# Altium PCB TermWylPompy1.PcbDoc
Units mm, origin at the board's own origin, x right, y up, seen from the top; angles counter-clockwise.
Board outline 230 x 115 mm, 2 copper layers (Top Layer, Bottom Layer), stack 1.621 mm thick; 150 components, 132 nets, 573 pads, 0 vias.
Unrouted connection lines stored in the file: 337.
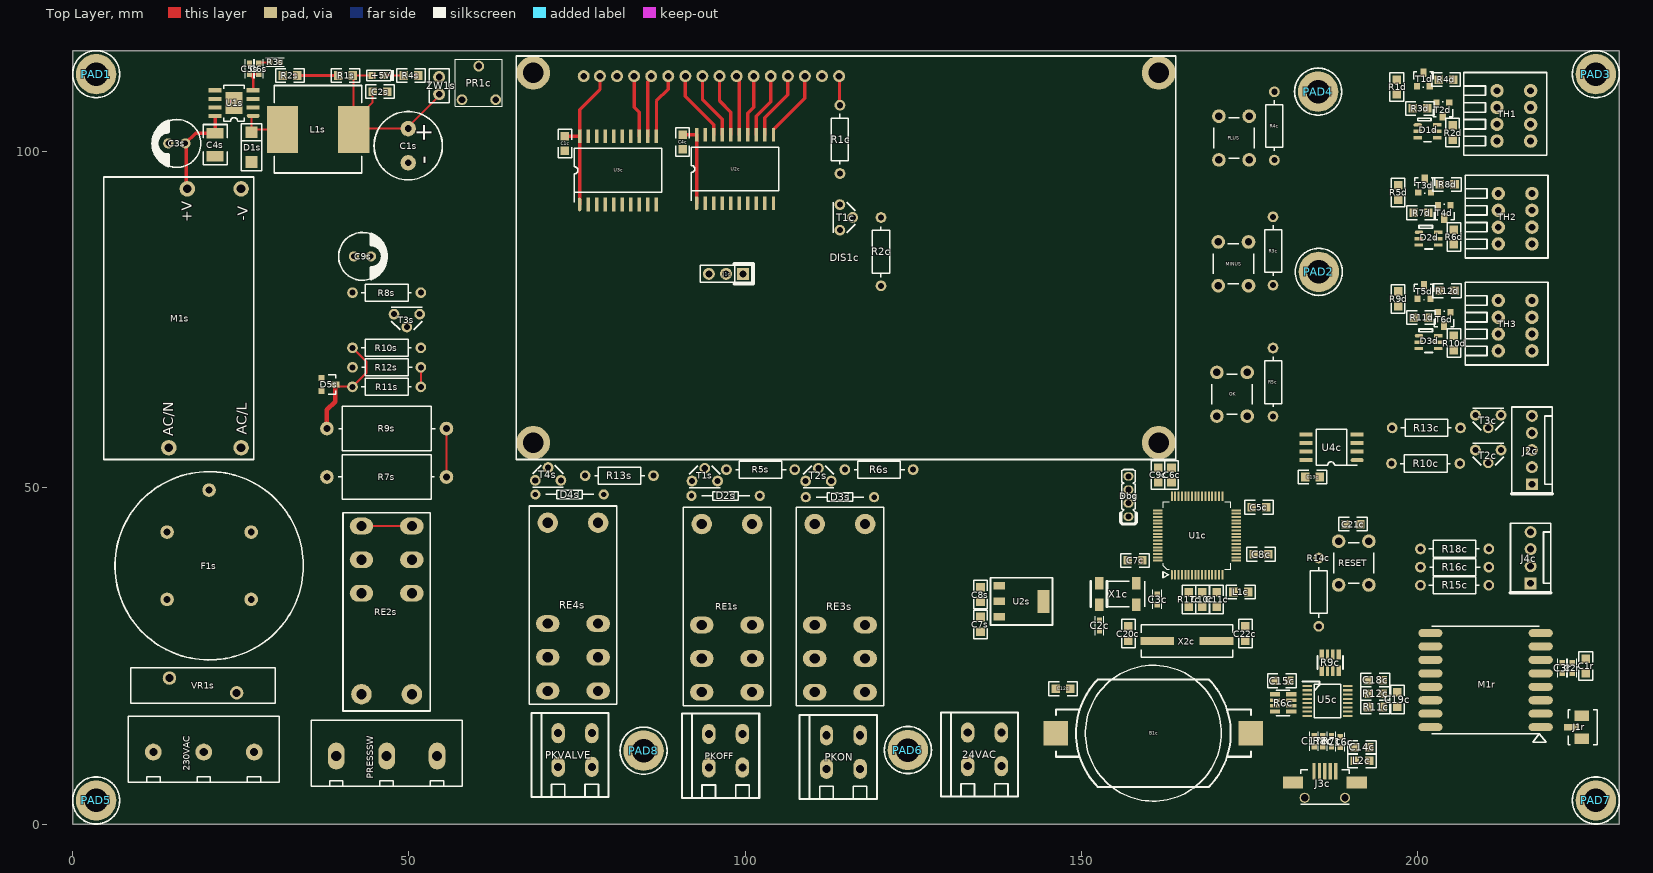
[diagram p0: Top Layer view]
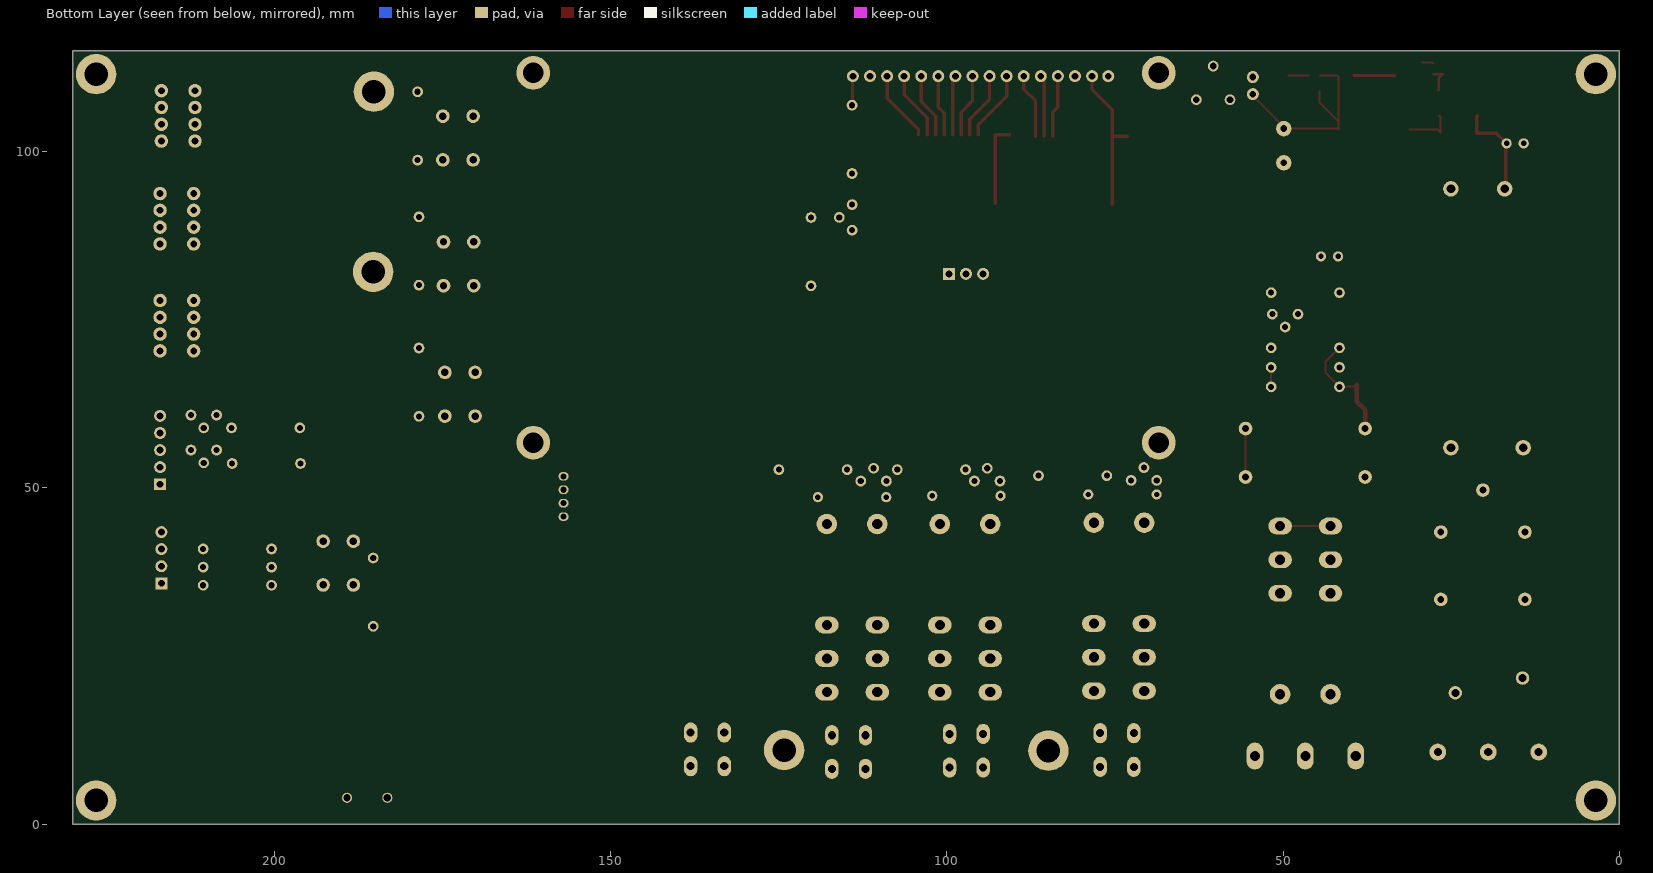
[diagram p1: Bottom Layer view, seen from below]

## Layer stack, top to bottom
Top Solder: solder mask 0.0102, Solder Resist, Dk 3.5
Top Layer: signal copper 0.0356
Dielectric1: dielectric 1.55, FR-4, Dk 4.8
Bottom Layer: signal copper 0.0356
Bottom Solder: solder mask 0.0102, Solder Resist, Dk 3.5

## Board outline
0,0 0,115 230,115 230,0

## Design rules (kind name [scope] priority, off if disabled: settings)
BoardOutlineClearance [All] p1: gap=0.5 ignorepadtopadclearanceinfootprint=FALSE
Clearance ClearanceMains [InNet('PUMPL')  or InNet('PUMPN') or InNet('PRESSSWL') or InNet('PRESSSWN') or InNet('ACL') or InNet('ACN') or InNet('ACFL') or InNet('ACFN')] p1: gap=3.5 ignorepadtopadclearanceinfootprint=TRUE
Clearance InPolyClearance [InPoly] p2: gap=0.3 ignorepadtopadclearanceinfootprint=FALSE except(0: Arc-Hole Track-Hole SMDPad-Hole THPad-Hole Via-Hole Fill-Hole Poly-Hole Region-Hole Text-Hole)
Clearance ClearanceMidLayer [OnMid] p3: gap=0.152 ignorepadtopadclearanceinfootprint=FALSE except(0: Arc-Hole Track-Hole SMDPad-Hole THPad-Hole Via-Hole Fill-Hole Poly-Hole Region-Hole Text-Hole)
Clearance ClearanceOuterLayer [OnBottomLayer or OnTopLayer] p4: gap=0.152 ignorepadtopadclearanceinfootprint=FALSE
ComponentClearance [All] p1 off: gap=0.254 collisioncheckmode=3 verticalgap=0.254 showdistances=FALSE
Height [All] p1: minheight=0 maxheight=40 prefheight=12.7
HoleSize [All] p1: absolutevalues=TRUE maxlimit=6 minlimit=0.025 maxpercent=80.000 minpercent=20.000
MinimumAnnularRing MinimumAnnularRingOuterLayer [OnTopLayer or OnBottomLayer] p1: minimumring=0.152
MinimumAnnularRing MinimumAnnularRingOnMid [OnMid] p2: minimumring=0.127
MinimumSolderMaskSliver [not(IsComponentPrimitive and OnSolderMask)] p1 off: minsoldermaskwidth=0.1
MinimumSolderMaskSliver SilkscreenOverComponentPads [All] p2: minsoldermaskwidth=0.1
NetAntennae [All] p1: netantennaetolerance=0.3
PolygonConnect PolygonConnectDirect [IsVia] p1: connectstyle=Direct reliefconductorwidth=0.254 reliefentries=4 polygonreliefangle="90 Angle" airgapwidth=0.254
PolygonConnect PolygonConnectElse [All] p2: connectstyle=Relief reliefconductorwidth=0.25 reliefentries=4 polygonreliefangle="90 Angle" airgapwidth=0.25
RoutingVias [All] p1: holewidth=0.6 width=1.1 viastyle="Through Hole" minholewidth=0.3 minwidth=0.5 maxholewidth=2 maxwidth=4
SilkToSilkClearance [All] p1: silktosilkclearance=0.1
SilkToSolderMaskClearance SilkToSolderMaskClearanceVia [IsVia] p1: minsilkscreentomaskgap=0.1 clearancetoexposedcopper=TRUE
SilkToSolderMaskClearance SilkToSolderMaskClearancePad [IsPad] p2: minsilkscreentomaskgap=0.1 clearancetoexposedcopper=TRUE
SolderMaskExpansion [All] p1: expansion=0.1 istentingtop=FALSE
UnRoutedNet [All] p1: checkbadconnections=TRUE
Width [All] p1: maxlimit=4 minlimit=0.102 preferedwidth=0.18 minimp=50.000000 maximp=50.000000 favimp=50.000000 checkconnectedcopper=TRUE
22 further rules are at their usual default settings.

## Classes and differential pairs
component class TermWylPompy1_main: PAD1 PAD2 PAD3 PAD4 PAD5 PAD6 PAD7 PAD8
component class Zasilanie: 24VAC 230VAC +5V C1s C2s C3s C4s C5s C6s C7s C8s C9s D1s D2s D3s D4s D5s F1s L1s M1s PKOFF PKON PKVALVE PRESSSW PRESSSW1s PUMP1s R1s R2s R3s R4s R5s R6s R7s R8s R9s R10s R11s R12s R13s RE1s RE2s RE3s RE4s T1s T2s T3s T4s U1s U2s VR1s ZW1s
component class Radio: C1r C2r C3r J1r M1r
component class DS18B20: D1d D2d D3d R1d R2d R3d R4d R5d R6d R7d R8d R9d R10d R11d R12d T1d T2d T3d T4d T5d T6d TH1 TH2 TH3
component class CPU: B1c C1c C2c C3c C4c C5c C6c C7c C8c C9c C10c C11c C12c C13c C14c C15c C16c C17c C18c C19c C20c C21c C22c Dbg DIS1c J1c J2c J3c J4c L1c L2c MINUS OK PLUS PR1c R1c R2c R3c R4c R5c R6c R7c R8c R9c R10c R11c R12c R13c R14c R15c R16c R17c R18c RESET T1c T2c T3c TXDA TXDB U1c U2c U3c U4c U5c X1c X2c

## Components (designator, comment, footprint, x,y, rotation, side; value= is the part's Value field where it differs from the comment)
24VAC "DG235-5.0-02P" DG235-5.0-02P 135.6,11.1 r0 top
230VAC "DG300-7.5-3P11" DG300-7.5-3P11#1 19.5,10.7 r180 top
+5V "LED0603-RW120" D0603 45.4,111.3 r0 top
B1c "CH004-2032" CH004-2032 160.7,13.5 r0 top
C1c "100n/50" 0805 73.2,101.2 r270 top
C1r "10u/10" 0805 225,23.5 r90 top
C1s "470u/25" CE2040 49.9,103.4 r270 top
C2c "15p/50" 0603-IPC 152.7,29.5 r90 top
C2r "100n/50" 0603-IPC 223,23.2 r90 top
C2s "100n/50" 0805 45.7,108.9 r0 top
C3c "15p/50" 0603-IPC 161.3,33.4 r270 top
C3r "100p/50" 0603-IPC 221.5,23.2 r90 top
C3s "100u/35" CE1028#1 15.5,101.2 r180 top
C4c "100n/50" 0805 90.7,101.4 r270 top
C4s "4u7/50" 1210 21.2,102.729 r270 top
C5c "100n/50" 0805 176.4,47.1 r0 top
C5s "220p/50" 0603-IPC 26.3,112.3 r90 top
C6c "100n/50" 0805 163.4,51.9 r90 top
C6s "22n/50" 0603-IPC 27.7,112.3 r90 top
C7c "100n/50" 0805 158,39.2 r180 top
C7s "1u/25" 0805 135,29.7 r270 top
C8c "100n/50" 0805 176.7,40.1 r0 top
C8s "1u/25" 0805 135,34.1 r90 top
C9c "4u7/16" 0805 161.4,51.9 r90 top
C9s "100u/35" CE1028#2 43.1,84.4 r0 top
C10c "10n/50" 0805 168,33.4 r270 top
C11c "1u/25" 0805 170.1,33.4 r270 top
C12c "100n/50" 0805 147.3,20.1 r0 top
C13c "100n/50" 0805 184.4,51.6 r0 top
C14c "10n/50" 0805 191.7,11.4 r180 top
C15c "100n/50" 0805 179.8,21.3 r180 top
C16c "47p/50" 0603-IPC 188.5,12.2 r90 top
C17c "47p/50" 0603-IPC 184.6,12.3 r90 top
C18c "10n/50" 0805 193.7,21.4 r180 top
C19c "4u7/16" 0805 197,18.5 r90 top
C20c "22p/50" 0805 157,28.3 r270 top
C21c "100n/50" 0805 190.4,44.6 r0 top
C22c "22p/50" 0805 174.4,28.3 r270 top
D1d "RCLAMP0504S.TCT" SOT23-6 200,103.95 r270 top
D1s "10MQ040N" SMA 26.6,100.7 r0 top
D2d "RCLAMP0504S.TCT" SOT23-6 200.2,88 r270 top
D2s "1N4148" CE02 97.1,48.8 r180 top
D3d "RCLAMP0504S.TCT" SOT23-6 200.2,72.6 r270 top
D3s "1N4148" CE02 114.1,48.6 r180 top
D4s "1N4148" CE02 73.9,49 r180 top
D5s "BZX84C5V1" SOT23-3 37,66.3 r270 top
Dbg "ZL303-04P" PLMS4S 157,45.7 r90 top
DIS1c "JHD204A-BW" JHD204A 115,84.2 r0 top
F1s "1FM414-1R" 1FM414 20.3,38.4 r90 top
J1c "JUMPERx3" 3SIP100 99.7,81.8 r180 top
J1r "RF-IPX125-1G" HIROSE-UFL 224.4,14.4 r270 top
J2c "NS25-W5P" WF05S 217,55.6 r90 top
J3c "MUSB-B5-S-VT-TSMT-1" MUSB-B5-S-VT-TSMT1 186.2,8.1 r0 top
J4c "NS25-W4P" WF04S 216.8,39.6 r90 top
L1c "BLM21AG121SN1D" 0805 173.7,34.5 r180 top
L1s "68u/3.2A" SRR1208 36.5,103.3 r0 top
L2c "BLM21AH102" 0805 191.7,9.4 r0 top
M1r "RFM98W" RFM98W 210.1,21.4 r0 top
M1s "MFM-10-24" MFM-10-24 15.8,74.2 r90 top
MINUS "DTS63K" DTS63K 172.6,83.3 r180 top
OK "DTS63K" DTS63K 172.4,63.9 r180 top
PAD1 "PAD3_5MM" PAD3_5MM 3.5,111.5 r0 top
PAD2 "PAD3_5MM" PAD3_5MM 185.3,82.1 r0 top
PAD3 "PAD3_5MM" PAD3_5MM 226.5,111.5 r0 top
PAD4 "PAD3_5MM" PAD3_5MM 185.2,108.9 r0 top
PAD5 "PAD3_5MM" PAD3_5MM 3.5,3.5 r0 top
PAD6 "PAD3_5MM" PAD3_5MM 124.2,11 r0 top
PAD7 "PAD3_5MM" PAD3_5MM 226.5,3.5 r0 top
PAD8 "PAD3_5MM" PAD3_5MM 84.9,10.9 r0 top
PKOFF "DG235-5.0-02P" DG235-5.0-02P 97.1,10.9 r0 top
PKON "DG235-5.0-02P" DG235-5.0-02P 114.6,10.7 r0 top
PKVALVE "DG235-5.0-02P" DG235-5.0-02P 74.7,11 r0 top
PLUS "DTS63K" DTS63K 172.7,102 r180 top
PR1c "RKT6V-20K" RKT6V 60.4,110.2 r0 top
PRESSSW "DG300-7.5-3P11" DG300-7.5-3P11#2 46.7,10.1 r180 top
R1c "27R 5%" R402510 114.1,101.8 r270 top
R1d "4k7" 0805R 196.9,109.6 r90 top
R1s "8k2" 0805R 40.6,111.3 r180 top
R2c "13k 5%" R402510 120.2,85.1 r90 top
R2d "4k7" 0805R 205.2,102.8 r90 top
R2s "2k7" 0805R 32.3,111.3 r180 top
R3c "13k 5%" R402510 178.5,85.2 r270 top
R3d "100R" 0805R 200.321,106.4 r0 top
R3s "4k7" 0603R 30.1,113.3 r0 top
R4c "13k 5%" R402510 178.7,103.8 r270 top
R4d "100R" 0805R 204.2,110.7 r0 top
R4s "1k" 0805R 50.3,111.3 r0 top
R5c "13k 5%" R402510 178.5,65.7 r270 top
R5d "4k7" 0805R 197.1,93.9 r90 top
R5s "13k 5%" R402510 102.3,52.7 r180 top
R6c "4x47k" 1206RP 180,18 r90 top
R6d "4k7" 0805R 205.4,87.3 r90 top
R6s "13k 5%" R402510 119.9,52.7 r180 top
R7c "27R" 0603R 187.2,12.3 r90 top
R7d "100R" 0805R 200.5,90.9 r0 top
R7s "470R 5% 1W" R705226 46.7,51.6 r180 top
R8c "27R" 0603R 185.9,12.3 r90 top
R8d "100R" 0805R 204.4,95.1 r0 top
R8s "10k" R402510 46.7,79 r0 top
R9c "4x47k" 1206RP 187,24 r0 top
R9d "4k7" 0805R 197.1,78.1 r90 top
R9s "470R 5% 1W" R705226 46.7,58.8 r0 top
R10c "13k 5%" R402510 201.2,53.6 r0 top
R10d "4k7" 0805R 205.4,71.5 r90 top
R10s "13k 5%" R402510 46.7,70.8 r0 top
R11c "10k" 0805R 193.7,17.4 r180 top
R11d "100R" 0805R 200.5,75.3 r0 top
R11s "120R 5%" R402510 46.7,65 r0 top
R12c "15k" 0805R 193.7,19.4 r0 top
R12d "100R" 0805R 204.4,79.3 r0 top
R12s "120R 5%" R402510 46.7,67.9 r180 top
R13c "13k 5%" R402510 201.3,58.9 r0 top
R13s "13k 5%" R402510 81.3,51.8 r180 top
R14c "100k" R402510 185.3,34.479 r90 top
R15c "13k 5%" R402510 205.5,35.5 r0 top
R16c "13k 5%" R402510 205.5,38.2 r180 top
R17c "220R" 0805R 166,33.4 r270 top
R18c "13k 5%" R402510 205.5,40.9 r0 top
RE1s "RM94-2012-35-1024" RM84-P#1 97.3,44.6 r0 top
RE2s "RM84-2012-35-5230" RM84-P#2 46.7,19.3 r180 top
RE3s "RM94-2012-35-1024" RM84-P#1 114.1,44.6 r0 top
RE4s "RM94-2012-35-1024" RM84-P#1 74.4,44.8 r0 top
RESET "DTS63K" DTS63K 190.5,38.8 r0 top
T1c "BC547" CE35V4 116,90.2 r90 top
T1d "2N7002" SOT23-3 199.9,109.7 r0 top
T1s "BC547" CE35V4 94,52.9 r180 top
T2c "BC547" CE35V4 210.5,53.7 r0 top
T2d "2N7002" SOT23-3 204.7,107.3 r180 top
T2s "BC547" CE35V4 110.9,52.9 r180 top
T3c "BC547" CE35V4 210.5,58.9 r0 top
T3d "2N7002" SOT23-3 200.1,93.9 r0 top
T3s "BC547" CE35V4 49.7,73.9 r0 top
T4d "2N7002" SOT23-3 204.913,92.016 r180 top
T4s "BC547" CE35V4 70.7,53 r180 top
T5d "2N7002" SOT23-3 200,78.1 r0 top
T6d "2N7002" SOT23-3 204.9,76.1 r180 top
TH1 "Wago233-204" Wago233-204 214.3,105.3 r90 top
TH2 "Wago233-204" Wago233-204 214.5,90 r90 top
TH3 "Wago233-204" Wago233-204 214.5,74.1 r90 top
U1c "STM32F103RBT6" MS-026BCD 167.2,42.9 r90 top
U1s "L5973D" HSOP8 24,107.2 r180 top
U2c "SN74HC245DW" 20SOIC300 98.5,97.4 r90 top
U2s "NCP1117ST33T3G" SOT-223 137.8,35.4 r270 top
U3c "SN74HC245DW" 20SOIC300 81.1,97.2 r90 top
U4c "SST25VF016B-50-4I-S2AF" 8SOIC200 191,54.1 r180 top
U5c "FT230XS" MO-137AB 186.6,18.3 r0 top
VR1s "SIOV-S20K250" SIOV-S20K275 19.4,20.6 r180 top
X1c "ABS25-32.768KHZ-6-T" ABS25CRYSTAL 155.4,34.2 r0 top
X2c "8.00MHz" HC49SMP 165.7,27.2 r180 top
ZW1s "SHORT2MM54" SHUNT_2MM54 54.5,109.8 r90 top

## Footprints (in the part's own frame and the unit in brackets; to place one, negate y for a bottom-side part, rotate by r counter-clockwise, add the part's x,y. Pads: shape width x height; smd on the part's side, far side on the other; paste and mask are expansions set on the pad)
1FM414 [mil]
  round 80 hole 40: 1(-196.85,-246.06) 2(-196.85,246.06) 3(196.85,-246.06) 4(196.85,246.06) 5(442.91,0)
  silkscreen extent -551,-551 551,551
3SIP100 [mil]
  rect 70x70 hole 40: 1(0,0)
  round 70 hole 40: 2(100,0) 3(200,0)
  silkscreen extent -59,-59 250,59
8SOIC200 [mil]
  oval 76x24 smd: 1(0,0)
  rect 76x24 smd: 2(0,-50) 3(0,-100) 4(0,-150) 5(300,-150) 6(300,-100) 7(300,-50) 8(300,0)
  silkscreen extent 0,-180 240,30, body extent -10,-173 310,23, height 67
20SOIC300 [mil]
  oval 80x20 smd: 1(-200,225)
  rect 80x20 smd: 2(-200,175) 3(-200,125) 4(-200,75) 5(-200,25) 6(-200,-25) 7(-200,-75) 8(-200,-125) 9(-200,-175) 10(-200,-225) 11(200,-225) 12(200,-175) 13(200,-125) 14(200,-75) 15(200,-25) 16(200,25) 17(200,75) 18(200,125) 19(200,175) 20(200,225)
  silkscreen extent -187,-255 128,255, body extent -198,-251 196,248, height 67
0603-IPC [mm]
  rect 0.8x0.8 smd: 1(-0.8,0) 2(0.8,0)
  silkscreen extent -1.4,-0.65 1.4,0.65, body extent -0.8,-0.4 0.8,0.4, height 1
0603R [mm]
  rect 0.8x0.8 smd: 1(-0.8,0) 2(0.8,0)
  silkscreen extent -1.4,-0.65 1.4,0.65, body extent -0.8,-0.4 0.8,0.4, height 0.45
0805 [mil]
  rect 50x50 smd: 1(-42.5,0) 2(42.5,0)
  silkscreen extent -84,-40 84,40, body extent -39,-28 39,28, height 51
0805R [mil]
  rect 50x50 smd: 1(-42.5,0) 2(42.5,0)
  silkscreen extent -84,-40 84,40, body extent -39,-25 39,25, height 24
1206RP [mm]
  rect 0.65x1.524 smd: 1(-1.275,-1.219) 4(1.275,-1.219) 5(1.275,1.219) 8(-1.275,1.219)
  rect 0.5x1.524 smd: 2(-0.4,-1.219) 3(0.4,-1.219) 6(0.4,1.219) 7(-0.4,1.219)
  silkscreen extent -1.9,-1 1.9,1, body extent -1.6,-0.8 1.6,0.8, height 0.55
1210 [mil]
  rect 60x100 smd: 1(0,0) 2(135,0)
  silkscreen extent -50,-70 185,70, body extent 5,-49 130,49, height 75
ABS25CRYSTAL [mm]
  rect 1.3x1.9 smd paste+0 mask+0.04: 1(-2.75,-1.6) 2(2.75,-1.6) 3(2.75,1.6) 4(-2.75,1.6)
  silkscreen extent -4,-1.9 4,1.9, body extent -4,-2 4,2, height 2.5
CE02 [mil]
  round 60 hole 31.5: ANOD(200,0) CATH(-200,0)
  silkscreen extent -140,-25 140,25, body extent -212,-51 212,51, height 98
CE35V4 [mm]
  round 1.6 hole 0.9: BASE(0,0) COLL(1.905,1.905) EMIT(-1.905,1.905)
  silkscreen extent -2.29,-0.38 2.29,2.92, body extent -2.66,-1.09 2.66,3.23, height 11.33
CE1028#1 [mil]
  round 60 hole 32: 1(50,0) 2(-50,0)
  silkscreen extent -140,-140 140,140, body extent -138,-138 137,138, height 591
CE1028#2 [mil]
  round 60 hole 31.5: 1(50,0) 2(-50,0)
  silkscreen extent -140,-140 140,140, body extent -138,-138 137,138, height 591
CE2040 [mil]
  round 90 hole 40: 1(200,0) 2(0,0)
  silkscreen extent -100,-200 300,200, body extent -96,-197 296,196, height 787
CH004-2032 [mm]
  rect 3.6x3.6 smd: 1(-14.5,0) 2(14.5,0)
  silkscreen extent -14.5,-10.1 14.5,10.1, body extent -15,-10 15,9.96, height 6
D0603 [mm]
  rect 1.1x1 smd: ANOD(-0.85,0) CATH(0.85,0)
  silkscreen extent -1.7,-0.8 2.3,0.8, body extent -1.06,-0.7 0.94,0.7, height 1.35
DG235-5.0-02P [mm]
  oval 2x3 hole 1.2: 1(-2.5,-2.5) 2(-2.5,2.5) 3(2.5,-2.5) 4(2.5,2.5)
  silkscreen extent -6.5,-7 5,5.5, body extent -6.5,-7 5,5.5, height 15.5
DG300-7.5-3P11#1 [mm]
  round 2.5 hole 1.2: 1(-7.5,0) 2(0,0) 3(7.5,0)
  silkscreen extent -11.25,-5.3 11.25,4.5, body extent -11.22,-5.2 12.02,4.6, height 13.8
DG300-7.5-3P11#2 [mm]
  oval 2.5x4 hole 1.5: 1(-7.5,0) 2(0,0) 3(7.5,0)
  silkscreen extent -11.25,-5.3 11.25,4.5, body extent -11.22,-5.2 12.02,4.6, height 13.8
DTS63K [mm]
  round 2.032 hole 1.1: 1(2.25,3.25) 2(2.25,-3.25) 3(-2.25,3.25) 4(-2.25,-3.25)
  silkscreen extent -3,-3 3,3, body extent -3,-3.4 3,3.4, height 7
HC49SMP [mm]
  rect 5x1.2 smd: 1(-4.4,0) 2(4.4,0)
  silkscreen extent -6.8,-2.4 6.8,2.4, body extent -6.35,-2.4 6.35,2.4, height 4
HIROSE-UFL [mm]
  rect 1x2.25 smd: 1(0,-1.5)
  rect 1.55x2.2 smd: 2(-1.725,0) 3(1.725,0)
  silkscreen extent -2.6,-2 2.6,2.3, body extent -1.5,-1.25 1.5,1.75, height 1.15
HSOP8 [mil]
  oval 76x24 smd: 1(-112.5,75)
  rect 76x24 smd: 2(-112.5,25) 3(-112.5,-25) 4(-112.5,-75) 5(112.5,-75) 6(112.5,-25) 7(112.5,25) 8(112.5,75)
  rect 100x130 smd: 9(0,0)
  silkscreen extent -60,-105 60,105, body extent -118,-96 118,96, height 69
JHD204A [mil]
  round 70 hole 40: 1(-1535.43,1062.99) 2(-1440.43,1062.99) 3(-1340.43,1062.99) 4(-1240.43,1062.99) 5(-1140.43,1062.99) 6(-1040.43,1062.99) 7(-940.43,1062.99) 8(-840.43,1062.99) 9(-740.43,1062.99) 10(-640.43,1062.99) 11(-540.43,1062.99) 12(-440.43,1062.99) 13(-340.43,1062.99) 14(-240.43,1062.99) 15(-140.43,1062.99) 16(-40.43,1062.99)
  round 196.85 hole 118.11: 17(-1830.71,-1082.68) 18(1830.71,-1082.68) 19(-1830.71,1082.68) 20(1830.71,1082.68)
  silkscreen extent -1929,-1181 1929,1181
MFM-10-24 [mm]
  round 2.3 hole 1.3: 1(-18.25,-9.25) 2(-18.25,1.5) 3(20.25,-9.25) 4(20.25,-1.25)
  silkscreen extent -20,-11.15 22,11.15, body extent -20,-11.15 22,11.15, height 20.5
MO-137AB [mil]
  rect 55x12 smd: 1(-118,87.5) 2(-118,62.5) 3(-118,37.5) 4(-118,12.5) 5(-118,-12.5) 6(-118,-37.5) 7(-118,-62.5) 8(-118,-87.5) 9(118,-87.5) 10(118,-62.5) 11(118,-37.5) 12(118,-12.5) 13(118,12.5) 14(118,37.5) 15(118,62.5) 16(118,87.5)
  silkscreen extent -148,-97 77,114, body extent -119,-98 119,98, height 70
MS-026BCD [mm]
  oval 1.4x0.3 smd: 1(-5.85,3.75)
  rect 1.4x0.3 smd: 2(-5.85,3.25) 3(-5.85,2.75) 4(-5.85,2.25) 5(-5.85,1.75) 6(-5.85,1.25) 7(-5.85,0.75) 8(-5.85,0.25) 9(-5.85,-0.25) 10(-5.85,-0.75) 11(-5.85,-1.25) 12(-5.85,-1.75) 13(-5.85,-2.25) 14(-5.85,-2.75) 15(-5.85,-3.25) 16(-5.85,-3.75) 33(5.85,-3.75) 34(5.85,-3.25) 35(5.85,-2.75) 36(5.85,-2.25) 37(5.85,-1.75) 38(5.85,-1.25) 39(5.85,-0.75) 40(5.85,-0.25) 41(5.85,0.25) 42(5.85,0.75) 43(5.85,1.25) 44(5.85,1.75) 45(5.85,2.25) 46(5.85,2.75) 47(5.85,3.25) 48(5.85,3.75)
  rect 0.3x1.4 smd: 17(-3.75,-5.85) 18(-3.25,-5.85) 19(-2.75,-5.85) 20(-2.25,-5.85) 21(-1.75,-5.85) 22(-1.25,-5.85) 23(-0.75,-5.85) 24(-0.25,-5.85) 25(0.25,-5.85) 26(0.75,-5.85) 27(1.25,-5.85) 28(1.75,-5.85) 29(2.25,-5.85) 30(2.75,-5.85) 31(3.25,-5.85) 32(3.75,-5.85) 49(3.75,5.85) 50(3.25,5.85) 51(2.75,5.85) 52(2.25,5.85) 53(1.75,5.85) 54(1.25,5.85) 55(0.75,5.85) 56(0.25,5.85) 57(-0.25,5.85) 58(-0.75,5.85) 59(-1.25,5.85) 60(-1.75,5.85) 61(-2.25,5.85) 62(-2.75,5.85) 63(-3.25,5.85) 64(-3.75,5.85)
  silkscreen extent -6.3,-5 5,5.05, body extent -6,-6 6,6, height 1.6
MUSB-B5-S-VT-TSMT1 [mm]
  rect 0.5x2.5 smd: 1(1.6,-0.25) 2(0.8,-0.25) 3(0,-0.25) 4(-0.8,-0.25) 5(-1.6,-0.25)
  rect 3x1.8 smd: 6(-4.75,-1.9) 7(4.75,-1.9)
  round 1.5 hole 1.1 mask+0.3: 8(-3,-4.2) 9(3,-4.2)
  silkscreen extent -3.6,-5.2 3.6,0, body extent -6,-5.2 6,0.85, height 8
PAD3_5MM [mm]
  round 6 hole 3.5: 1(0,0)
  silkscreen extent -3.5,-3.5 3.5,3.5
PLMS4S [mm]
  oval 1.3x1.5 hole 0.9: 1(0,0) 2(2,0) 3(4,0) 4(6,0)
  silkscreen extent -1.1,-1.15 7,1.15, body extent -1,-1 7,1, height 6
R402510 [mm]
  round 1.6 hole 0.9: 1(-5.08,0) 2(5.08,0)
  silkscreen extent -3.81,-1.27 3.68,1.27, body extent -5.38,-1.3 5.38,1.3, height 2.49
R705226 [mil]
  round 80 hole 40: 1(350,0) 2(-350,0)
  silkscreen extent -280,-130 283,130, body extent -370,-102 379,102, height 204
RFM98W [mm]
  oval 3.6x1.2 smd: 1(8.2,-7) 2(8.2,-5) 3(8.2,-3) 4(8.2,-1) 5(8.2,1) 6(8.2,3) 7(8.2,5) 8(8.2,7) 9(-8.2,7) 10(-8.2,5) 11(-8.2,3) 12(-8.2,1) 13(-8.2,-1) 14(-8.2,-3) 15(-8.2,-5) 16(-8.2,-7)
  silkscreen extent -8,-9.25 9,8
RKT6V [mm]
  round 1.6 hole 1 paste+0 mask+0.04: 1(-2.5,-2.5) 2(0,2.5) 3(2.5,-2.5)
  silkscreen extent -3.5,-3.5 3.5,3.5
RM84-P#1 [mm]
  round 3.048 hole 1.5: 1(-3.75,0) 2(3.75,0)
  oval 3.5x2.5 hole 1.5: 3(3.75,-15) 4(3.75,-20) 5(3.75,-25) 6(-3.75,-15) 7(-3.75,-20) 8(-3.75,-25)
  silkscreen extent -6.5,-27 6.5,2.5, body extent -6.35,-26.75 6.35,2.25, height 15.7
RM84-P#2 [mm]
  round 3.048 hole 1.524: 1(-3.75,0) 2(3.75,0)
  oval 3.5x2.5 hole 1.524: 3(3.75,-15) 4(3.75,-20) 5(3.75,-25) 6(-3.75,-15) 7(-3.75,-20) 8(-3.75,-25)
  silkscreen extent -6.5,-27 6.5,2.5, body extent -6.35,-26.75 6.35,2.25, height 15.7
SHUNT_2MM54 [mm]
  round 1.8 hole 1: 1(-1.27,0) 2(1.27,0)
  silkscreen extent -2.54,-1.5 2.54,1.5
SIOV-S20K275 [mm]
  round 2 hole 1.2: 1(-5,1.1) 2(5,-1.1)
  silkscreen extent -10.75,-2.65 10.75,2.65, body extent -10.75,-2.65 10.67,2.65, height 25.48
SMA [mil]
  rect 70x70 smd: 1(0,85) 2(0,-90)
  silkscreen extent -60,-140 60,135, body extent -59,-106 59,106, height 98
SOT23-3 [mil]
  rect 36x36 smd: 1(0,0) 2(75,0)
  rect 36x50 smd: 3(38,80)
  silkscreen extent -20,-5 95,85, body extent -22,-7 97,87, height 43
SOT23-6 [mm]
  oval 0.5x1.27 smd: 1(0,0)
  rect 0.5x1.27 smd: 2(0.95,0) 3(1.9,0) 4(1.9,2.9) 5(0.95,2.9) 6(0,2.9)
  silkscreen extent -1,0 2.5,2, body extent -0.5,-0.05 2.4,2.95, height 1.45
SOT-223 [mm]
  rect 1.1x1.75 smd: 1(0,0) 2(2.3,0) 3(4.6,0)
  rect 3.45x1.75 smd: 4(2.3,6.55)
  silkscreen extent -1.2,-1.3 5.8,7.9, body extent -0.95,-0.14 5.55,6.82, height 1.69
SRR1208 [mm]
  rect 4.65x7 smd: 1(-5.3,0) 2(5.3,0)
  silkscreen extent -6.5,-6.5 6.5,6.5, body extent -6.5,-6.5 6.53,6.48, height 8
Wago233-204 [mm]
  round 2 hole 1: 1(-3.75,2.5) 2(-3.75,-2.5) 3(-1.25,2.5) 4(-1.25,-2.5) 5(1.25,2.5) 6(1.25,-2.5) 7(3.75,2.5) 8(3.75,-2.5)
  silkscreen extent -5.85,-4.9 6.45,7.42, body extent -5.85,-4.9 6.45,7.42, height 16.45
WF04S [mil]
  rect 70x70 hole 40: 1(-150,0)
  round 70 hole 40: 2(-50,0) 3(50,0) 4(150,0)
  silkscreen extent -205,-118 201,118, body extent -205,-118 201,118, height 453
WF05S [mil]
  rect 70x70 hole 40: 1(-200,0)
  round 70 hole 40: 2(-100,0) 3(0,0) 4(100,0) 5(200,0)
  silkscreen extent -256,-118 252,118, body extent -250,-118 252,118, height 453

## Part data
24VAC PKOFF PKON PKVALVE: library part Con29, Manufacturer5=Degson, DateOfPrice5=2010-01-01, Descript="Listwa zaciskowa; kątowe 90°; 1,5mm2; tory:2; cynowany; 15A; szary", ID=29, Kod=Con29, Price5=0, Reference5=DG235-5.0-02P, Replacement=bd, Supplier5=tme.pl, Typ5=DG235-5.0-02P-11-00A(H)
230VAC PRESSSW: library part Con33, Manufacturer5=Degson, DateOfPrice5=2010-01-01, Descript="Listwa zaciskowa; kątowe 90°; 2,5mm2; 7,5mm; tory:3; cynowany; 24A", ID=33, Kod=Con33, Price5=1, Reference5=DG300-7.5-3P11, Replacement="maritex: TB7503S", Supplier5=tme.pl, Typ5=DG300-7.5-03P-11-00A(H)
+5V: library part Opt25, Manufacturer5=Honglitronic, DateOfPrice5=2020-05-10, Descript="Dioda LED, SMD 0603, Czerwona 626-636nm, 50-70 mCd /10mA, water clear, 120°", ID=25, Kod=Opt25, Price5=0,12, Reference5=LED0603-RW120, Supplier5=maritex.com.pl, Typ5=LED0603-RW120
B1c: library part Con27, Manufacturer5=COMF, DateOfPrice5=01-01-2010, Descript="Battery holder for CR2032", ID=27, Kod=Con27, Price5=2, Reference5=CH004-2032, Replacement=bd, Supplier5=tme.pl, Typ5=CH004-2032
C1c C2s C4c C5c C6c C7c C8c C12c C13c C15c C21c: library part CAP7, Manufacturer5=Samsung, Descript="Kondensator: ceramiczny; MLCC; 100nF; 50V; X7R; ±10%; SMD; 0805", ID=7, Kod=CAP7, Price5=0, Reference5=CL21B104KBCNNNC, Supplier5=tme.pl, Typ5=CL21B104KBCNNNC
  C1c C2s C4c C5c C6c C7c C8c C15c C21c: DateOfPrice5=2010-01-01
  C12c C13c: DateOfPrice5=01-01-2010
C1r: library part CAP25, Manufacturer5=Samsung, DateOfPrice5=2010-01-01, Descript="Kondensator: ceramiczny; MLCC; 10uF; 10V; X7R; ±10%; SMD; 0805", ID=25, Kod=CAP25, Price5=0, Reference5=CL21B106KPQNNNG, Supplier5=tme.pl, Typ5=CL21B106KPQNNNG
C1s: library part CAP81, Manufacturer5=Samxon, DateOfPrice5=2010-01-01, Descript="capacitor electrolythic 470uF/25V, 20%, 10x16, 5mm, low ESR", ID=81, Kod=CAP81, Price5=0, Reference5=GT470/25, Supplier5=tme.pl, Typ5=GT470u/25
C2c C3c: library part CAP126, Manufacturer5=Samsung, DateOfPrice5=2010-01-01, Descript="Kondensator: ceramiczny; MLCC; 15pF; 50V; C0G; ±5%; SMD; 0603", ID=126, Kod=CAP126, Price5=0, Reference5=CL10C150JB8NNNC, Supplier5=tme.pl, Typ5=CL10C150JB8NNNC
C2r: library part CAP6, Manufacturer5=Samsung, DateOfPrice5=2020-05-10, Descript="Kondensator: ceramiczny; MLCC; 100nF; 50V; X7R; ±5%; SMD; 0603", ID=6, Kod=CAP6, Price5=0,25, Reference5=CL10B104JB8NNNC, Supplier5=tme.pl, Typ5=CL10B104JB8NNNC
C3r: library part CAP10, Manufacturer5=Samsung, DateOfPrice5=2010-01-01, Descript="capacitor 100pF,50V, 0603, COG, 5%", ID=10, Kod=CAP10, Price5=0, Reference5=CL10C101JB8NNNC, Supplier5=tme.pl, Typ5=CL10C101JB8NNNC
C3s C9s: library part CAP15, Manufacturer5=SAMHA, DateOfPrice5=2010-01-01, Descript="Kondensator: elektrolityczny; THT; 100uF; 35VDC; Ø6,3x11mm; ±20%", ID=15, Kod=CAP15, Price5=0, Reference5=SD1V107M6L011BB, Supplier5=tme.pl, Typ5=SD1V107M6L011BB
C4s: library part CAP99, Manufacturer5=Samsung, DateOfPrice5=2010-01-01, Descript="Kondensator: ceramiczny; 4,7uF; 50V; X7R; ±10%; SMD; 1210; -55÷125°C", ID=99, Kod=CAP99, Price5=2, Reference5=CL32B475KBUYNNE, Supplier5=tme.pl, Typ5=CL32B475KBUYNNE
C5s: library part CAP45, Manufacturer5=Samsung, DateOfPrice5=2010-01-01, Descript="Kondensator: ceramiczny; 220pF; 50V; X7R; ±10%; SMD; 0603; -55÷125°C", ID=45, Kod=CAP45, Price5=0, Reference5=CL10B221KB8NNNC, Supplier5=tme.pl, Typ5=CL10B221KB8NNNC
C6s: library part CAP51, Manufacturer5=Samsung, DateOfPrice5=2010-01-01, Descript="Kondensator: ceramiczny; 22nF; 50V; X7R; ±10%; SMD; 0603; -55÷125°C", ID=51, Kod=CAP51, Price5=0, Reference5=CL10B223KB8NNNC, Supplier5=tme.pl, Typ5=CL10B223KB8NNNC
C7s C8s C11c: library part CAP38, Manufacturer5=Samsung, DateOfPrice5=2010-01-01, Descript="Kondensator: ceramiczny; MLCC; 1uF; 25V; X7R; ±10%; SMD; 0805", ID=38, Kod=CAP38, Price5=0, Reference5=CL21B105KAFNNN, Supplier5=tme.pl, Typ5=CL21B105KAFNNN
C9c C19c: library part CAP97, Manufacturer5=Kemet, DateOfPrice5=2020-05-10, Descript="Kondensator: ceramiczny; MLCC; 4,7uF; 16VDC; X7R; ±5%; SMD; 0805", ID=97, Kod=CAP97, Price5=1,5, Reference5=C0805C475J4RACAUTO, Supplier5=tme.pl, Typ5=C0805C475J4RACAUTO
C10c C14c C18c: library part CAP21, Manufacturer5=Samsung, DateOfPrice5=2010-01-01, Descript="Kondensator: ceramiczny; MLCC; 10nF; 50V; X7R; ±10%; SMD; 0805", ID=21, Kod=CAP21, Price5=0, Reference5=CL21B103KBANNNC, Supplier5=tme.pl, Typ5=CL21B103KBANNNC
C16c C17c: library part CAP85, Manufacturer5=Yageo, DateOfPrice5=2020-05-10, Descript="Kondensator: ceramiczny; MLCC; 47pF; 50V; C0G; ±5%; SMD; 0603", ID=85, Kod=CAP85, Price5=0,08, Reference5=CC0603JRNPO9470, Supplier5=tme.pl, Typ5=CC0603JRNPO9BN470
C20c C22c: library part CAP54, Manufacturer5=Samsung, DateOfPrice5=2020-05-10, Descript="Kondensator: ceramiczny; MLCC; 22pF; 50V; C0G; ±5%; SMD; 0805", ID=54, Kod=CAP54, Price5=0,12, Reference5=CL21C220JBANNNC, Supplier5=tme.pl, Typ5=CL21C220JBANNNC
D1d D2d D3d: library part DIO7, Manufacturer5=SEMTECH, DateOfPrice5=2010-01-01, Descript="Dioda: drabinka diodowa; 6V; 6A; jednokierunkowa; 150W; SOT23-6", ID=7, Kod=DIO7, Price5=1, Reference5=RCLAMP0504S.TCT, Supplier5=tme.pl, Typ5=RCLAMP0504S.TCT
D1s: library part DIO1, Manufacturer5=Vishay, DateOfPrice5=2010-01-01, Descript="Dioda: prostownicza Schottky; SMD; 40V; 2,1A; DO214AC", ID=1, Kod=DIO1, Price5=0, Reference5=10MQ040NTRPBF, Supplier5=tme.pl, Typ5=VS-10MQ040NTRPBF
D2s D3s D4s: library part DIO2, Manufacturer5=Vishay, DateOfPrice5=2010-01-01, Descript="Dioda: przełączająca; 100V; 300mA; 2A; DO35", ID=2, Kod=DIO2, Price5=0, Reference5=1N4148-TAP, Supplier5=tme.pl, Typ5=1N4148-TAP
D5s: library part DIO13, Manufacturer5=NXP, DateOfPrice5=2010-01-01, Descript="Zener diode 5.1V, 0.3W, SOT-23", ID=13, Kod=DIO13, Price5=0, Reference5=BZX84C5V1, Supplier5=tme.pl, Typ5=BZX84-C5V1.215
Dbg: library part Con298, Manufacturer5=Ninigi, DateOfPrice5=2020-05-10, Descript="Listwa kołkowa; kołkowe; męskie; PIN:4; proste; 2mm; THT; 1x4", ID=298, Kod=Con298, Price5=0,2, Reference5=ZL303-04P, Replacement=bd, Supplier5=tme.pl, Typ5=ZL303-04P
DIS1c: library part Opt46, Manufacturer5=JHD, DateOfPrice5=2020-07-24, Descript="Wyświetlacz LCD 4x20 znaków niebieski", ID=46, Kod=Opt46, Price5=26, Reference5=LCD-01015, Supplier5=Botland, Typ5=JHD204A-BW
F1s: library part Ind14, InductCurr=-, Manufacturer5=FilterCon, DateOfPrice5=2010-01-01, Descript="Radio filter 250VAC, 1A", ID=14, Kod=Ind14, Price5=15, Reference5=1FM414-1R, Supplier5=tme.pl, Typ5=-
J1c: library part Con59, DateOfPrice5=01-01-2010, Descript="Listwa kołkowa; kołkowe; męskie; PIN: 3; proste; 2,54mm; THT; 1x3", ID=59, Kod=Con59, Price5=0, Reference5=ZL201-03G, Replacement=bd, Supplier5=tme
J1r: library part Con210, Manufacturer5=Hirose, DateOfPrice5=2010-01-01, Descript="Miniaturowe 1G, męskie gniazdo RF, antenowe, o wysokość 1.25mm, 1 generacji, obudowa srebrzona, kontakt złocony, 0-6 GHz, do montażu SMT", ID=210, Kod=Con210, Price5=1, Reference5=RF-IPX125-1G-AG, Replacement=bd, Supplier5=maritex.com.pl
J2c: library part Con109, Manufacturer5=ninigi, DateOfPrice5=2010-01-01, Descript="Gniazdo; przewód-płytka; męskie; PIN:5; 2,54mm; THT; NS25; 250V; 3A", ID=109, Kod=Con109, Price5=0, Reference5=NS25-W5P, Replacement="maritex: WF05S", Supplier5=tme.pl, Typ5=NS25-W5P
J3c: library part Con92, Manufacturer5=AdamTech, DateOfPrice5=2010-01-01, Descript="Gniazdo; USB B mini; SMT; pionowe; V: USB 2.0; złocony", ID=92, Kod=Con92, Price5=2, Reference5=MUSB-B5-S-VT-TSMT1, Replacement=bd, Supplier5=tme.pl, Typ5=MUSB-B5-S-VT-TSMT-1
J4c: library part Con107, Manufacturer5=ninigi, DateOfPrice5=2010-01-01, Descript="Gniazdo; przewód-płytka; męskie; PIN:4; 2,54mm; THT; NS25; 250V; 3A", ID=107, Kod=Con107, Price5=0, Reference5=NS25-W4P, Replacement="maritex: WF04S", Supplier5=tme.pl, Typ5=NS25-W4P
L1c: library part Ind42, InductCurr=-, DateOfPrice5=2010-01-01, Descript="Chip inductor SMD, 0805, Imax=0.2A,Z=120ohm, Rdc=0.15ohm", ID=42, Kod=Ind42, Manufacturer5=-, Price5=0, Reference5=BLM21AG121SN1D, Supplier5=tme.pl, Typ5=-
L1s: library part Ind37, InductCurr=3,2A, Manufacturer5=Wuerth, DateOfPrice5=2010-01-01, Descript="7447709680 - Cewka mocy do montażu powierzchniowego, Seria WE-PD, 68 µH, 3.2 A, 3.6 A, Osłonięte, 0.089 ohm", ID=37, Kod=Ind37, Price5=10, Reference5=1635947, Supplier5=farnell.com, Typ5=7447709680
L2c: library part Ind43, InductCurr=-, Manufacturer5=Murata, DateOfPrice5=2010-01-01, Descript="Ferryt: koralik; Imp.@ 100MHz:1000Ω; Montaż: SMD; 200mA; Obud:0805", ID=43, Kod=Ind43, Price5=0, Reference5=BLM21AH102SN1D, Supplier5=tme.pl, Typ5=BLM21AH102SN1D
M1r: library part Mod57, Manufacturer5=Hope, DateOfPrice5=2010-01-01, Descript="Moduł: RF; transceiver FM; FSK, GFSK, GMSK, LoRa, MSK, OOK; 433,92MHz", ID=57, Kod=Mod57, Price5=39, Reference5=RFM98W-433S2, Supplier5=tme.pl, Typ5=RFM98W-433S2
M1s: library part Mod92, Manufacturer5=MeanWell, DateOfPrice5=2010-01-01, Descript="Zasilacz: impulsowy; 10W; 80÷264VAC; Wyjścia: 1; 420mA; -30÷85°C", ID=92, Kod=Mod92, Price5=33, Reference5=MFM-10-24, Supplier5=tme.pl, Typ5=MFM-10-24
MINUS OK PLUS RESET: library part Elm16, Manufacturer5=Diptronics, DateOfPrice5=2010-01-01, Descript="Mikroprzełącznik TACT; SPST-NO; Pozycje: 2; 0,05A/12VDC; THT; brak", ID=16, Kod=Elm16, Price5=1, Reference5=DTS63K, Supplier5=tme.pl, Typ5=DTS-63K
PAD1 PAD2 PAD3 PAD4 PAD5 PAD6 PAD7 PAD8: library part Oth106, Manufacturer5=bd, DateOfPrice5=2010-01-01, Descript=bd, ID=106, Identyfikator=106, PartIdx=Oth106, Price5=-1, Reference5=bd, Supplier5=bd, Typ5=bd
PR1c: library part Vre33, Manufacturer5="SR Passives", DateOfPrice5=2010-01-01, Descript="Potencjometr: montażowy, jednoobrotowy, stojący; 20kΩ; 100mW; ±30%", ID=33, Kod=Vre33, Price5=0, Reference5=RKT6V-20K, Supplier5=tme.pl, Typ5=RKT6V-20K
R1c: library part Res347, Manufacturer5="Royal Ohm", DateOfPrice5="29-07-2020 18:38:04", Descript="Rezystor: węglowy; THT; 27Ω; 0,25W; ±5%; Ø2,5x6,8mm; osiowe", ID=347, Kod=Res347, Price5=0,1, Reference5=1/4W27R, Supplier5=tme.pl, Typ5=CFR0W4J0270A50
R1d R2d R5d R6d R9d R10d: library part Res172, Manufacturer5="Royal Ohm", DateOfPrice5="2020-06-25 12:16:54", Descript="Rezystor: thick film; SMD; 0805; 4,7kΩ; 0,125W; ±1%; -55÷125°C", ID=172, Kod=Res172, Price5=0,1, Reference5=SMD0805-4K7-1%, Supplier5=tme.pl, Typ5=0805S8F4701T5E
R1s: library part Res233, Manufacturer5="Royal Ohm", DateOfPrice5="2020-06-25 12:16:54", Descript="Rezystor: thick film; SMD; 0805; 8,2kΩ; 0,125W; ±1%; -55÷125°C", ID=233, Kod=Res233, Price5=0,1, Reference5=SMD0805-8K2-1%, Supplier5=tme.pl, Typ5=0805S8F8201T5E
R2c R3c R4c R5c R5s R6s R10c R10s R13c R13s R15c R16c R18c: library part Res66, Manufacturer5="Royal Ohm", DateOfPrice5="26-07-2020 12:26:58", Descript="Rezystor: węglowy; THT; 13kΩ; 0,25W; ±5%; Ø2,5x6,8mm; osiowe", ID=66, Kod=Res66, Price5=0,06, Reference5=ML0.25W-13K-5%, Supplier5=mrq, Typ5=CFR0W4J0133A50
R2s: library part Res115, Manufacturer5="Royal Ohm", DateOfPrice5="2020-06-25 12:16:54", Descript="Rezystor: thick film; SMD; 0805; 2,7kΩ; 0,125W; ±1%; -55÷125°C", ID=115, Kod=Res115, Price5=0,1, Reference5=SMD0805-2K7-1%, Supplier5=tme.pl, Typ5=0805S8F2701T5E
R3d R4d R7d R8d R11d R12d: library part Res13, Manufacturer5="Royal Ohm", DateOfPrice5="2020-06-25 12:16:54", Descript="Rezystor: thick film; SMD; 0805; 100om; 0,125W; ±1%; -55÷125°C", ID=13, Kod=Res13, Price5=0,1, Reference5=SMD0805-100R-1%, Supplier5=tme.pl, Typ5=0805S8F1000T5E
R3s: library part Res171, Manufacturer5="Royal Ohm", DateOfPrice5="2020-06-25 12:16:54", Descript="Rezystor: thick film; SMD; 0603; 4,7kom; 0,1W; ±1%; -55÷125°C", ID=171, Kod=Res171, Price5=0,1, Reference5=SMD0603-4K7-1%, Supplier5=tme.pl, Typ5=0603SAF4701T5E
R4s: library part Res53, Manufacturer5="Royal Ohm", DateOfPrice5="2020-06-25 12:16:54", Descript="Rezystor: thick film; SMD; 0805; 1kom; 0,125W; ±1%; -55÷125°C", ID=53, Kod=Res53, Price5=0,1, Reference5=SMD0805-1K-1%, Supplier5=tme.pl, Typ5="0805WAF 1K T5E"
R6c R9c: library part Res182, Manufacturer5="Royal Ohm", DateOfPrice5=2020-05-10, Descript="Drabinka rezystorowa: Y; 47kΩ; SMD; 1206; Il.rezystorów:4; 63mW", ID=182, Kod=Res182, Price5=0,1, Reference5=DR1206-47K-4/8, Supplier5=tme.pl, Typ5=4D03WGJ0473T
R7c R8c: library part Res106, Manufacturer5="Royal Ohm", DateOfPrice5=2020-05-10, Descript="Rezystor: thick film; SMD; 0603; 27Ω; 0,1W; ±1%; -55÷125°C", ID=106, Kod=Res106, Price5=0,1, Reference5=SMD0603-27R-1%, Supplier5=tme.pl, Typ5=0603SAF270JT5E
R7s R9s: library part Res63, Manufacturer5=-, DateOfPrice5="2020-08-01 09:57:11", Descript="ML1W-470R-5% Rezystor metalizowany THT 470om; 1W; ±5%; O5,5x13mm", ID=63, Kod=Res63, Price5=0,1, Reference5=ML1W-470R-5%, Supplier5=mrq, Typ5=-
R8s: library part Res17, Manufacturer5="Royal Ohm", DateOfPrice5="2020-06-25 12:16:54", Descript="Rezystor: metal film; THT; 10kΩ; 0,6W; ±1%; Ø2,5x6,8mm; 50ppm/°C", ID=17, Kod=Res17, Price5=0,1, Reference5=M0.6W-10K, Supplier5=tme.pl, Typ5=MF006FF1002A50
R11c: library part Res16, Manufacturer5="Royal Ohm", DateOfPrice5="2020-06-25 12:16:54", Descript="Rezystor: thick film; SMD; 0805; 10kom; 0,125W; ±1%; -55÷125°C", ID=16, Kod=Res16, Price5=0,1, Reference5=SMD0805-10K-1%, Supplier5=tme.pl, Typ5=0805S8F1002T5E
R11s R12s: library part Res32, Manufacturer5="Royal Ohm", DateOfPrice5="2020-08-01 06:36:55", Descript="Rezystor: węglowy; THT; 120Ω; 0,25W; ±5%; Ø2,5x6,8mm; osiowe", ID=32, Kod=Res32, Price5=0,1, Reference5=1/4W120R, Supplier5=tme, Typ5=CFR0W4J0121A50
R12c: library part Res40, Manufacturer5="Royal Ohm", DateOfPrice5="2020-06-25 12:16:54", Descript="Rezystor: thick film; SMD; 0805; 15kΩ; 0,125W; ±1%; -55÷125°C", ID=40, Kod=Res40, Price5=0,1, Reference5=SMD0805-15K-1%, Supplier5=tme.pl, Typ5="0805WAF 15K T5E"
R14c: library part Res11, Manufacturer5="Royal Ohm", DateOfPrice5="25-06-2020 12:16:54", Descript="Rezystor: metal film; THT; 100kohm; 0,6W; ±1%; Ø2,5x6,8mm; 50ppm/°C", ID=11, Kod=Res11, Price5=0,1, Reference5=M0.6W-100K, Supplier5=tme.pl, Typ5=MF006FF1003A50
R17c: library part Res88, Manufacturer5="Royal Ohm", DateOfPrice5=2020-05-10, Descript="Rezystor: thick film; SMD; 0805; 220Ω; 0,125W; ±1%; -55÷125°C", ID=88, Kod=Res88, Price5=0,08, Reference5=SMD0805-220R-1%, Supplier5=tme.pl, Typ5=0805S8F2200T5E
RE1s RE3s RE4s: library part Rel24, Manufacturer5=Relpol, DateOfPrice5="2020-07-19 19:16:04", Descript="Przekaźnik: elektromagnetyczny; DPDT; Ucewki : 24VDC; 8A/250VAC, nie produkowany", ID=24, Kod=Rel24, Price5=5, Reference5=RM94-2012-35-1024, Supplier5=-, Typ5=RM94-2012-35-1024
RE2s: library part Rel15, Manufacturer5=Relpol, DateOfPrice5=2010-01-01, Descript="Przekaźnik: elektromagnetyczny; DPDT; Ucewki: 230VAC; 8A/250VAC", ID=15, Kod=Rel15, Price5=15, Reference5=RM84-P-230VAC, Supplier5=tme.pl, Typ5=RM84-2012-35-5230
T1c T1s T2c T2s T3c T3s T4s: library part Tra9, Manufacturer5=Diotec, DateOfPrice5=2010-01-01, Descript="Tranzystor: NPN; bipolarny; 50V; 100mA; 500mW; TO92", ID=9, Kod=Tra9, Price5=0,1, Reference5=BC547A, Supplier5=tme.pl, Typ5=BC547A
T1d T2d T3d T4d T5d T6d: library part Tra2, Manufacturer5=Fairchild, DateOfPrice5=2010-01-01, Descript="Tranzystor: N-MOSFET; unipolarny; 60V; 800mA; 200mW; SOT23", ID=2, Kod=Tra2, Price5=0, Reference5=2N7002, Supplier5=tme.pl, Typ5=2N7002
TH1 TH2 TH3: library part Con261, Manufacturer5=Wago, DateOfPrice5=2010-01-01, Descript="PCB terminal strip with push buttons 0.5mm2", ID=261, Kod=Con261, Price5=5, Reference5=112495, Replacement=bd, Supplier5=soselectronic.pl, Typ5=233-204
U1c: library part ICs273, Manufacturer5=ST, DateOfPrice5=01-01-2010, Descript="ARM Cortex-M3 CPU, 128kB Flash, 20kB RAM, USB, CAN, 3xUART, 2xI2C, 2xSPI, ADC, DAC, STM, LQFP64", ID=273, Kod=ICs273, Price5=17, Reference5=STM32F103RBT6, Supplier5=tme.pl, Typ5=STM32F103RBT6
U1s: library part ICs119, Manufacturer5=ST, DateOfPrice5=2010-01-01, Descript="Driver; przetwornica DC/DC; 2,5A; 1,2÷35V; 2,25W; Kanały: 1; 250kHz", ID=119, Kod=ICs119, Price5=10, Reference5=L5973D, Supplier5=tme.pl, Typ5=L5973D
U2c U3c: library part ICs123, Manufacturer5=TI, DateOfPrice5="29-07-2020 18:58:11", Descript="IC: cyfrowy; 3-state, bus transceiver; Kanały:8; SO20; 2÷6VDC", ID=123, Kod=ICs123, Price5=0,1, Reference5=SN74HC245DW, Supplier5=tme.pl, Typ5=SN74HC245DW
U2s: library part ICs176, Manufacturer5="ON Semiconductor", DateOfPrice5=2010-01-01, Descript="Stabilizator napięcia; LDO, liniowy, nieregulowany; 3,3V; 1A; SMD", ID=176, Kod=ICs176, Price5=0, Reference5=NCP1117ST33T3G, Supplier5=tme, Typ5=NCP1117ST33T3G
U4c: library part ICs252, Manufacturer5=Microchip, DateOfPrice5=2010-01-01, Descript="Pamięć: Serial Flash; SPI; 80MHz; 2,7÷3,6V; SO8-W", ID=252, Kod=ICs252, Price5=6, Reference5=SST25016B-504IS, Supplier5=tme.pl, Typ5=SST25VF016B-50-4I-S2AF
U5c: library part ICs109, Manufacturer5=FTDI, DateOfPrice5=2020-05-10, Descript="Interfejs; USB-basic UART; Ilość pinów CBUS:4; tuba; SSOP16", ID=109, Kod=ICs109, Price5=8,8, Reference5=FT230XS-R, Supplier5=tme.pl, Typ5=FT230XS-R
VR1s: library part Vre35, Manufacturer5=Epcos, DateOfPrice5=2020-06-03, Descript="Warystor: metalowo-tlenkowy; THT; 250VAC; 320VDC; 390V; 8000A; 140J", ID=35, Kod=Vre35, Price5=2,6, Reference5=SIOV-S20K250, Supplier5=tme.pl, Typ5=S20K250
X1c: library part Qua9, Freq=32.768kH, Manufacturer5=Abracon, DateOfPrice5=2010-01-01, Descript="32.768kHz crystal", ID=9, Kod=Qua9, Price5=3, Reference5=ABS25-32.768KHZ-6, Supplier5=tme.pl, Typ5=ABS25-32.768KHZ-6-T
X2c: library part Qua16, Freq=-, Manufacturer5=YIC, DateOfPrice5=2020-05-10, Descript="Rezonator: kwarcowy; 8MHz; ±30ppm; 20pF; SMD; HC49SM", ID=16, Kod=Qua16, Price5=2, Reference5=8.00M-SMDHC49S, Supplier5=tme.pl
ZW1s: library part Res74, Manufacturer5=-, Descript="Przewlekana zwora z drutu o rozstawie 2.54mm", ID=74, Kod=Res74, Price5=0,1, Reference5=-, Supplier5=-, Typ5=-

## Nets (pads, with @x,y where several pads share a name; then routed paths per layer and width w, separated by ;. In a path a pad name is that pad's centre, name@x,y a point inside that pad or via, vN(x,y) a via of type N, cw(c..) or ccw(c..) an arc to the next point about the centre after c; other vN are vias at no path point)
24VAC1: 24VAC.1 24VAC.2 RE1s.4 RE3s.4 RE4s.4
24VAC2: 24VAC.3 24VAC.4 RE1s.7 RE3s.7 RE4s.7
+3V3: C1r.1 C2r.1 C3r.1 C5c.1 C6c.1 C7c.1 C8c.1 C8s.1 C9c.1 C13c.1 Dbg.1 J1c.3 L1c.1 M1r.5 R1d.1 R3c.1 R4c.1 R5c.1 R5d.1 R8s.1 R9d.1 R14c.1 R15c.1 R16c.2 R18c.1 U1c.19 U1c.32 U1c.48 U1c.64 U2s.2 U2s.4 U4c.8
+5V: C7s.1 DIS1c.15 J1c.1 J2c.1 R2d.1 R6d.1 R10d.1 TH1.1 TH1.2 TH2.1 TH2.2 TH3.1 TH3.2 U2s.3 ZW1s.2
+24V: C3s.2 C4s.1 D2s.CATH D3s.CATH D4s.CATH M1s.4 RE1s.2 RE2s.4 RE2s.7 RE3s.2 RE4s.2 U1s.8 | length 14.5
  Top Layer w0.5: M1s.4 16.91,94.59 16.91,101.06 C3s.2 18.299,102.729 C4s.1 21.2,105.24 21.145,105.295 U1s.8
+VLCD: C1c.1 C4c.1 DIS1c.2 J1c.2 U2c.1 U2c.20 U3c.1 U3c.20 | length 34.8
  Top Layer w0.5: C1c.1 U3c.20 ; U3c.1 U3c.20 ; U3c.20 75.385,106.185 78.413,109.213 DIS1c.2 ; C4c.1 U2c.20 ; U2c.1 U2c.20
ACFL: F1s.3 M1s.1
ACFN: F1s.4 M1s.2
ACL: 230VAC.1 F1s.1 VR1s.1
ACN: 230VAC.3 F1s.2 VR1s.2
BLCD0: DIS1c.7 U2c.18 | length 10.5
  Top Layer w0.5: DIS1c.7 91.113,108.187 95.325,103.975 U2c.18
BLCD1: DIS1c.8 U2c.17 | length 9.9
  Top Layer w0.5: DIS1c.8 93.653,107.747 96.595,104.805 U2c.17
BLCD2: DIS1c.9 U2c.16 | length 9.4
  Top Layer w0.5: DIS1c.9 96.193,107.507 97.865,105.835 U2c.16
BLCD3: DIS1c.10 U2c.15 | length 8.9
  Top Layer w0.5: DIS1c.10 98.733,110.854 99.135,110.452 U2c.15
BLCD4: DIS1c.11 U2c.14 | length 9.1
  Top Layer w0.5: U2c.14 100.405,105.705 101.273,106.573 DIS1c.11
BLCD5: DIS1c.12 U2c.13 | length 9.6
  Top Layer w0.5: U2c.13 101.675,105.275 103.813,107.413 DIS1c.12
BLCD6: DIS1c.13 U2c.12 | length 10.1
  Top Layer w0.5: U2c.12 102.945,105.045 106.353,108.453 DIS1c.13
BLCD7: DIS1c.14 U2c.11 | length 10.7
  Top Layer w0.5: U2c.11 104.215,103.242 108.893,107.92 DIS1c.14
BLCDE: DIS1c.6 U3c.11 | length 9.6
  Top Layer w0.5: U3c.11 86.815,107.515 88.573,109.273 DIS1c.6
BLCDRS: DIS1c.4 U3c.13 | length 9.2
  Top Layer w0.5: DIS1c.4 83.5,111.193 83.5,106.6 84.275,105.825 U3c.13
BLCDRW: DIS1c.5 U3c.12 | length 9.1
  Top Layer w0.5: U3c.12 85.545,110.366 86.033,110.854 DIS1c.5
DIAG-RXD: R9c.1 U1c.43 U5c.1
DIAG-TXD: R6c.3 U1c.42 U5c.4
DSDATAIN0: R1d.2 T1d.3 U1c.15
DSDATAIN1: R5d.2 T3d.3 U1c.9
DSDATAIN2: R9d.2 T5d.3 U1c.51
DSDATAOUT0: R4d.1 U1c.8
DSDATAOUT1: R8d.1 U1c.10
DSDATAOUT2: R12d.1 U1c.52
GND: B1c.2 C1c.2 C1r.2 C1s.1 C2c.1 C2r.2 C2s.2 C3c.1 C3r.2 C3s.1 C4c.2 C4s.2 C5c.2 C5s.2 C6c.2 C7c.2 C7s.2 C8c.2 C8s.2 C9c.2 C9s.1 C10c.2 C11c.2 C12c.2 C13c.2 C14c.1 C15c.1 C16c.2 C17c.2 C18c.1 C19c.2 C20c.1 C21c.2 C22c.1 D1d.2 D1s.2 D2d.2 D3d.2 D5s.1 Dbg.3 DIS1c.1 J1r.2 J1r.3 J3c.5 J4c.4 M1r.9 M1r.16 M1s.3 MINUS.1 MINUS.2 OK.1 OK.2 PLUS.1 PLUS.2 PR1c.2 PR1c.3 R2s.2 R3s.2 R4s.2 R12c.2 R12s.2 RESET.1 RESET.2 T1c.EMIT T1d.2 T1s.EMIT T2c.EMIT T2d.2 T2s.EMIT T3c.EMIT T3d.2 T3s.EMIT T4d.2 T4s.EMIT T5d.2 T6d.2 TH1.5 TH1.6 TH2.5 TH2.6 TH3.5 TH3.6 U1c.12 U1c.18 U1c.31 U1c.47 U1c.60 U1c.63 U1s.3 U1s.7 U1s.9 U2c.10 U2c.19 U2s.1 U3c.2 U3c.3 U3c.4 U3c.5 U3c.6 U3c.10 U3c.19 U4c.4 U5c.5 U5c.13
KEYMINUS: MINUS.3 MINUS.4 R3c.2
KEYOK: OK.3 OK.4 R5c.2
KEYPLUS: PLUS.3 PLUS.4 R4c.2
KONFIG: J4c.3 R18c.2 U1c.14
LCD0: U1c.26 U2c.2
LCD1: U1c.27 U2c.3
LCD2: U1c.28 U2c.4
LCD3: U1c.55 U2c.5
LCD4: U1c.56 U2c.6
LCD5: U1c.57 U2c.7
LCD6: U1c.58 U2c.8
LCD7: U1c.59 U2c.9
LCDE: U1c.61 U3c.9
LCDLIGHT: R2c.1 U1c.62
LCDRS: U1c.25 U3c.7
LCDRW: U1c.24 U3c.8
LOK: J2c.4 T3c.COLL
LORACS: M1r.13 U1c.20
LORAIRQ: M1r.6 U1c.41
LORARESET: M1r.14 U1c.44
LPRZEGRZANIE: J2c.3 T2c.COLL
MISO: M1r.10 U1c.22 U4c.2
MOSI: M1r.11 U1c.23 U4c.5
Net+5V_ANOD: +5V.ANOD C1s.2 C2s.1 L1s.2 R1s.1 ZW1s.1 | length 31.4
  Top Layer w0.3: +5V.ANOD 41.92,111.3 41.8,111.18 L1s.2@41.8,104.475 ; C2s.1 44.621,107.296 L1s.2@41.8,104.475 ; ZW1s.1 54.5,108.265 49.9,103.665 C1s.2 41.9,103.4 L1s.2 L1s.2@41.8,104.475
Net+5V_CATH: +5V.CATH R4s.1 | length 3
  Top Layer w0.3: +5V.CATH R4s.1
NetC2c_2: C2c.2 U1c.3 X1c.1
NetC3c_2: C3c.2 U1c.4 X1c.2
NetC5s_1: C5s.1 C6s.1 U1s.4 | length 4
  Top Layer w0.4: U1s.4 26.857,110.942 C5s.1 C6s.1
NetC6s_2: C6s.2 R3s.1 | length 1.7
  Top Layer w0.3: C6s.2 27.8,113.2 29.2,113.2 R3s.1
NetC9s_2: C9s.2 D5s.3 R9s.2 R10s.1 R11s.1 | length 17.3
  Top Layer w0.3: D5s.3 39.339,65.028 41.592,65.028 R11s.1 43.7,67.08 43.7,68.72 R10s.1
  Top Layer w0.7: R9s.2 37.81,61.583 39.032,62.805 D5s.3
NetC10c_1: C10c.1 C11c.1 L1c.2 U1c.13
NetC14c_2: C14c.2 J3c.1 L2c.1
NetC18c_2: C18c.2 R11c.2 R12c.1 U5c.11
NetC22c_2: C22c.2 R17c.2 X2c.1
NetD1d_6: D1d.6 R2d.2 R3d.2 T2d.3 TH1.3 TH1.4
NetD1s_1: D1s.1 L1s.1 U1s.1 | length 7.4
  Top Layer w0.3: U1s.1 26.743,105.295 26.6,105.152 D1s.1 27.041,103.3 L1s.1
NetD2d_6: D2d.6 R6d.2 R7d.2 T4d.3 TH2.3 TH2.4
NetD2s_ANOD: D2s.ANOD RE1s.1 T1s.COLL
NetD3d_6: D3d.6 R10d.2 R11d.2 T6d.3 TH3.3 TH3.4
NetD3s_ANOD: D3s.ANOD RE3s.1 T2s.COLL
NetD4s_ANOD: D4s.ANOD RE4s.1 T4s.COLL
NetDIS1c_3: DIS1c.3 PR1c.1
NetDIS1c_16: DIS1c.16 R1c.1 | length 4.4
  Top Layer w0.5: DIS1c.16 114.037,111.136 114.037,106.943 R1c.1
NetJ1r_1: J1r.1 M1r.1
NetPKOFF_1: PKOFF.1 PKOFF.2 RE1s.8
NetPKOFF_3: PKOFF.3 PKOFF.4 RE1s.5
NetPKON_1: PKON.1 PKON.2 RE3s.8
NetPKON_3: PKON.3 PKON.4 RE3s.5
NetPKVALVE_1: PKVALVE.1 PKVALVE.2 RE4s.8
NetPKVALVE_3: PKVALVE.3 PKVALVE.4 RE4s.5
NetPRESSSW_1: PRESSSW.1 RE2s.1
NetPRESSSW_3: PRESSSW.3 RE2s.2
NetR1c_2: R1c.2 T1c.COLL
NetR1s_2: R1s.2 R2s.1 U1s.5 | length 6.1
  Top Layer w0.4: R2s.1 R1s.2
NetR2c_2: R2c.2 T1c.BASE
NetR3d_1: R3d.1 T1d.1
NetR4d_2: R4d.2 T2d.1
NetR5s_2: R5s.2 T1s.BASE
NetR6s_2: R6s.2 T2s.BASE
NetR7c_2: R7c.2 U5c.9
NetR7d_1: R7d.1 T3d.1
NetR7s_1: R7s.1 RE2s.5 RE2s.8 | length 7.5
  Top Layer w0.25: RE2s.5 RE2s.8
NetR7s_2: R7s.2 R9s.1 | length 7.2
  Top Layer w0.3: R7s.2 R9s.1
NetR8c_2: R8c.2 U5c.8
NetR8d_2: R8d.2 T4d.1
NetR10c_2: R10c.2 T2c.BASE
NetR10s_2: R10s.2 T3s.BASE
NetR11d_1: R11d.1 T5d.1
NetR11s_2: R11s.2 R12s.1 | length 2.9
  Top Layer w0.3: R11s.2 R12s.1
NetR12d_2: R12d.2 T6d.1
NetR13c_2: R13c.2 T3c.BASE
NetR13s_2: R13s.2 T4s.BASE
NRST: C21c.1 R14c.2 RESET.3 RESET.4 U1c.7
OK: R13c.1 U1c.38
OSCIN: C20c.2 U1c.5 X2c.2
OSCOUT: R17c.1 U1c.6
PE: 230VAC.2 F1s.5 PRESSSW.2
PK_OFF: R5s.1 U1c.40
PK_ON: R6s.1 U1c.45
PK_VALVE: R13s.1 U1c.11
PRZEGRZANIE: R10c.1 U1c.39
PUMPON#: R8s.2 T3s.COLL U1c.37
SCK: M1r.12 U1c.21 U4c.6
SHIELD: TH1.7 TH1.8 TH2.7 TH2.8 TH3.7 TH3.8
SSTCE: U1c.29 U4c.1
SSTHOLD: U1c.30 U4c.7
SSTWP: U1c.33 U4c.3
SWCLK: Dbg.2 U1c.49
SWDIO: Dbg.4 U1c.46
USB-CBUS0: R9c.3 U5c.15
USB-CBUS1: R9c.2 U5c.14
USB-CBUS2: R6c.1 U5c.7
USB-CBUS3: R9c.4 U5c.16
USB-CTS: R6c.2 U5c.6
USB-RTS: R6c.4 U5c.2
USB-VBUS: C19c.1 L2c.2 R11c.1 U5c.12
USB-VCCIO: C15c.2 R6c.5 R6c.6 R6c.7 R6c.8 R9c.5 R9c.6 R9c.7 R9c.8 U5c.3 U5c.10
USBDM: C16c.1 J3c.2 R7c.1
USBDP: C17c.1 J3c.3 R8c.1
VBAT: B1c.1 C12c.1 U1c.1
WL-KASUJ: J4c.2 R16c.1 U1c.16
WYL_RECZNIE: J4c.1 R15c.2 U1c.17
pads on no net: D1d.1 D1d.3 D1d.4 D1d.5 D2d.1 D2d.3 D2d.4 D2d.5 D3d.1 D3d.3 D3d.4 D3d.5 D5s.2 DIS1c.17 DIS1c.18 DIS1c.19 DIS1c.20 J2c.2 J2c.5 J3c.4 J3c.6 J3c.7 J3c.8 J3c.9 M1r.2 M1r.3 M1r.4 M1r.7 M1r.8 M1r.15 PAD1.1 PAD2.1 PAD3.1 PAD4.1 PAD5.1 PAD6.1 PAD7.1 PAD8.1 RE1s.3 RE1s.6 RE2s.3 RE2s.6 RE3s.3 RE3s.6 RE4s.3 RE4s.6 U1c.2 U1c.34 U1c.35 U1c.36 U1c.50 U1c.53 U1c.54 U1s.2 U1s.6 U3c.14 U3c.15 U3c.16 U3c.17 U3c.18 X1c.3 X1c.4

## Silkscreen, mask and mechanical layers (free items; w line width, h text height)
Obrys:
  the board outline again, w0.254

## Dimensions
230,0 to 230,115 on Dims
0,0 to 230,115 on Dims

## Text inside footprints (layer, text, board x,y; h text height)
C1s: Top Overlay "+" at 51.17,104.289 h2.54 r270; Top Overlay "-" at 51.424,99.336 h2.54 r270
M1s: Top Overlay "AC/L" at 25.9,57.85 h1.52 r90; Top Overlay "AC/N" at 14.95,57.65 h1.52 r90; Top Overlay "-V" at 26.05,89.7 h1.52 r90; Top Overlay "+V" at 17.7,89.45 h1.52 r90